# Altium PCB nfc.PcbDoc
Units mil, origin at the board's own origin, x right, y up, seen from the top; angles counter-clockwise.
Board outline 6000 x 4000 mil, 2 copper layers (Top Layer, Bottom Layer); 33 components, 60 nets, 92 pads, 0 vias.
Unrouted connection lines stored in the file: 44.
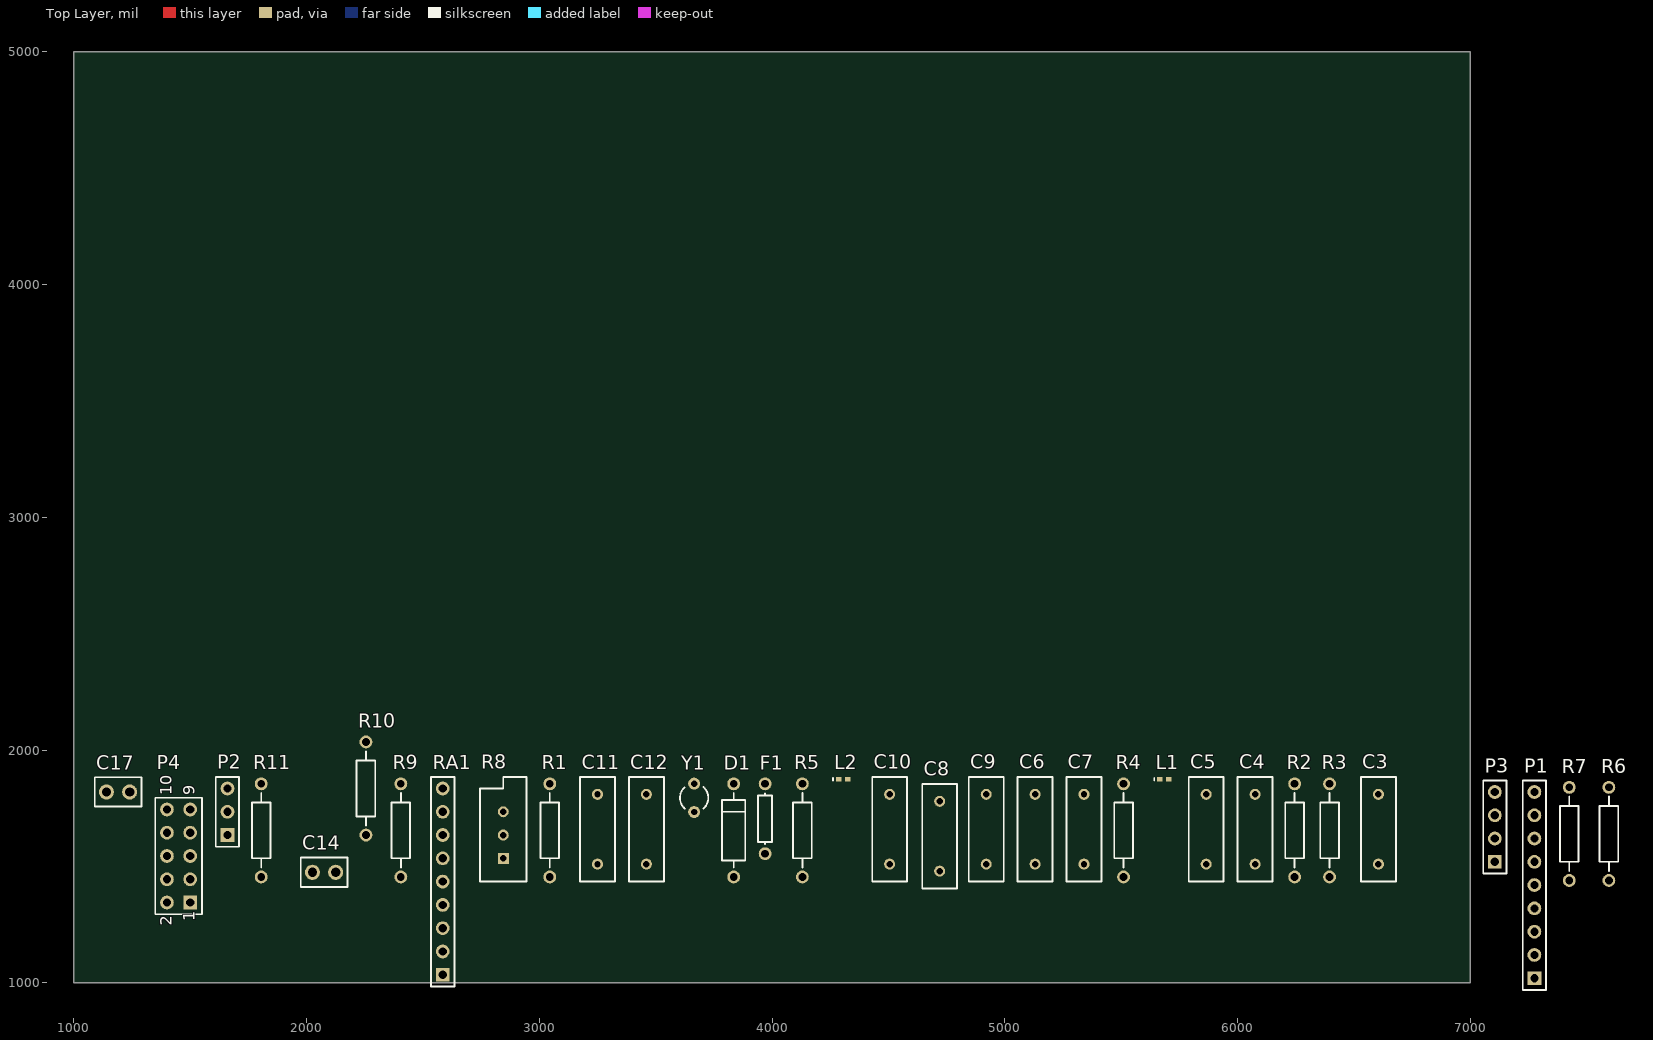
[diagram p0: Top Layer view]
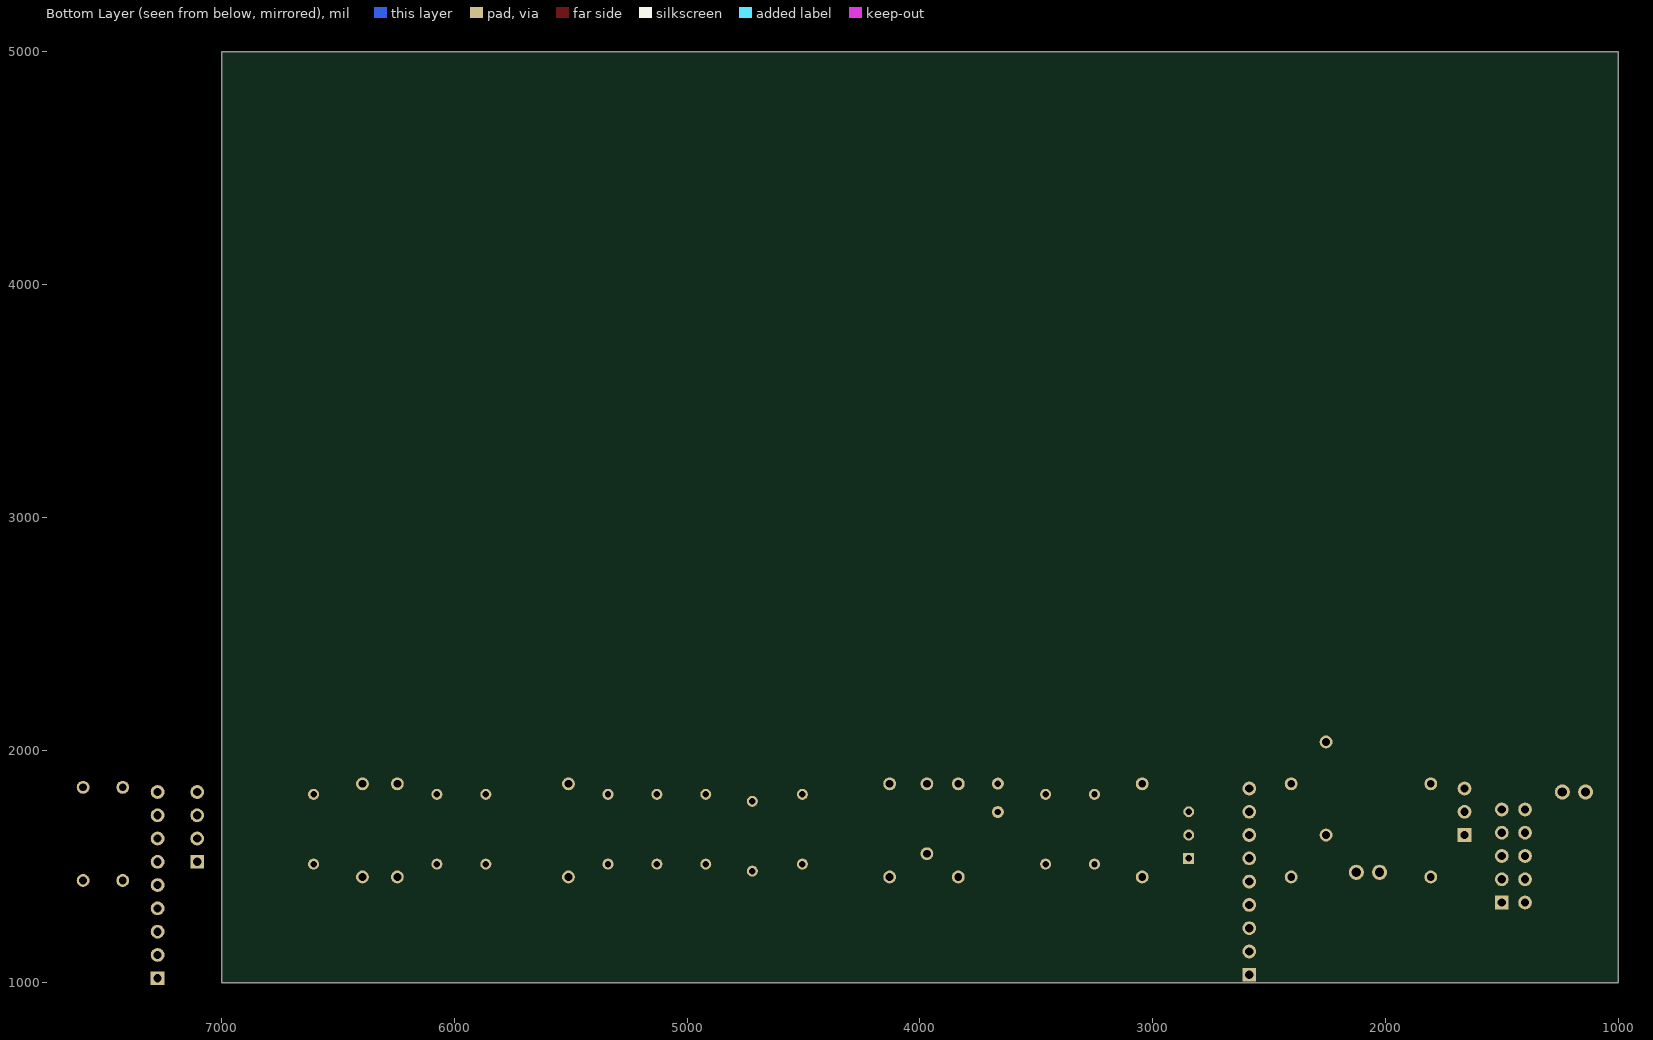
[diagram p1: Bottom Layer view, seen from below]

## Layer stack, top to bottom
Top Layer: signal copper 1.4
Dielectric: dielectric 12.6, FR-4, Dk 4.8
Bottom Layer: signal copper 1.4

## Board outline
1000,1000 7000,1000 7000,5000 1000,5000

## Design rules (kind name [scope] priority, off if disabled: settings)
Clearance [All] p1: gap=10
ComponentClearance [All] p1: gap=10 collisioncheckmode=3 verticalgap=10
PolygonConnect [All] p1: connectstyle=Relief reliefconductorwidth=10 reliefentries=4 polygonreliefangle="90 Angle"
RoomDefinition nfc [InComponentClass('nfc')] p1: confinementstyle=ConfineIn formatcopy=TRUE lockcomponents=FALSE outline 1080,975 6690,975 6690,1995 1080,1995
RoutingVias [All] p1: holewidth=28 width=50 viastyle="Through Hole" minholewidth=28 minwidth=50 maxholewidth=28 maxwidth=50
SolderMaskExpansion [All] p1: expansion=4
TestPointUsage [All] p1: valid=0 allowmultiple=FALSE
Testpoint [All] p1: side=15 testpointundercomponent=TRUE minsize=40 maxsize=100 preferedsize=60 minholesize=0 maxholesize=40 preferedholesize=32 testpointgrid=1 style=1023 order=0123456789
Width [All] p1: maxlimit=10 minlimit=10 preferedwidth=10
18 further rules are at their usual default settings.

## Components (designator, comment, footprint, x,y, rotation, side; value= is the part's Value field where it differs from the comment)
C3 "Cap" RAD-0.3 6605,1660 r90 top
C4 "Cap" RAD-0.3 6075,1660 r90 top
C5 "Cap" RAD-0.3 5865,1660 r90 top
C6 "Cap" RAD-0.3 5130,1660 r90 top
C7 "Cap" RAD-0.3 5340,1660 r90 top
C8 "Cap" RAD-0.3 4720,1630 r90 top
C9 "Cap" RAD-0.3 4920,1660 r90 top
C10 "Cap" RAD-0.3 4505,1660 r90 top
C11 "Cap" RAD-0.3 3250,1660 r90 top
C12 "Cap" RAD-0.3 3460,1660 r90 top
C14 "Cap" VP32-3.2 2075,1475 r0 top
C17 "Cap" VP32-3.2 1190,1820 r0 top
D1 "Diode 1N4001" DIODE-0.4 3835,1655 r90 top
F1 "FUSE1" AXIAL-0.3 3970,1705 r90 top
L1 "Inductor" 0402-A 5685,1875 r0 top
L2 "Inductor" 0402-A 4305,1875 r0 top
P1 "Header 9" HDR1X9 7275,1020 r90 top
P2 "Header 3" HDR1X3 1660,1635 r90 top
P3 "Header 4" HDR1X4 7105,1520 r90 top
P4 "Header 5X2" HDR2X5 1500,1345 r90 top
R1 "RES" AXIAL-0.4 3045,1655 r90 top
R2 "Res2" AXIAL-0.4 6245,1655 r90 top
R3 "Res2" AXIAL-0.4 6395,1655 r90 top
R4 "Res2" AXIAL-0.4 5510,1655 r90 top
R5 "Res2" AXIAL-0.4 4130,1655 r90 top
R6 "RES" AXIAL-0.4 7595,1640 r90 top
R7 "RES" AXIAL-0.4 7425,1640 r90 top
R8 "RPot" VR5 2845,1635 r90 top
R9 "RES" AXIAL-0.4 2405,1655 r90 top
R10 "RES" AXIAL-0.4 2255,1835 r90 top
R11 "RES" AXIAL-0.4 1805,1655 r90 top
RA1 "Res Arry" HDR1X9 2585,1035 r90 top
Y1 "27.12MHz" R38 3665,1795 r0 top

## Footprints (in the part's own frame and the unit in brackets; to place one, negate y for a bottom-side part, rotate by r counter-clockwise, add the part's x,y. Pads: shape width x height; smd on the part's side, far side on the other; paste and mask are expansions set on the pad)
0402-A [mm] "Chip Inductor; Body 1 x 0.5 mm (LxW typ)"
  rect 0.6x0.5 smd: 1(-0.5,0) 2(0.5,0)
  silkscreen extent -1.1,-0.15 -1.1,0.15
AXIAL-0.3 [mm] "Resistor; 2 Leads"
  round 1.4 hole 0.85: 1(-3.81,0) 2(3.81,0)
  silkscreen extent -2.77,-0.76 2.77,0.76
AXIAL-0.4 [mm] "Resistor; 2 Leads"
  round 1.4 hole 0.85: 1(-5.08,0) 2(5.08,0)
  silkscreen extent -4.06,-1.02 4.06,1.02
DIODE-0.4 [mm] "Tunnel Diode - Dependent Source Model; 2 Leads"
  round 1.4 hole 0.85: 1(-5.08,0) 2(5.08,0)
  silkscreen extent -4.06,-1.27 4.06,1.27
HDR1X3 [mm] "Connector; Header; 3 Position"
  rect 1.5x1.5 hole 0.9: 1(0,0)
  round 1.5 hole 0.9: 2(2.54,0) 3(5.08,0)
  silkscreen extent -1.27,-1.27 6.35,1.27
HDR1X4 [mm] "Connector; Header; 4 Position"
  rect 1.5x1.5 hole 0.9: 1(0,0)
  round 1.5 hole 0.9: 2(2.54,0) 3(5.08,0) 4(7.62,0)
  silkscreen extent -1.27,-1.27 8.89,1.27
HDR1X9 [mm] "Connector; Header; 9 Position"
  rect 1.5x1.5 hole 0.9: 1(0,0)
  round 1.5 hole 0.9: 2(2.54,0) 3(5.08,0) 4(7.62,0) 5(10.16,0) 6(12.7,0) 7(15.24,0) 8(17.78,0) 9(20.32,0)
  silkscreen extent -1.27,-1.27 21.59,1.27
HDR2X5 [mm] "Connector; Header; 5x2 Position"
  rect 1.5x1.5 hole 0.9: 1(0,0)
  round 1.5 hole 0.9: 2(0,2.54) 3(2.54,0) 4(2.54,2.54) 5(5.08,0) 6(5.08,2.54) 7(7.62,0) 8(7.62,2.54) 9(10.16,0) 10(10.16,2.54)
  silkscreen extent -1.27,-1.27 11.43,3.81
R38 [mm] "Crystal, Thru-Hole; 2 Leads; Body 3.1 x 8.2 mm (Dia.xH)"
  round 1.3 hole 0.7: 1(0,1.55) 2(0,-1.55)
  silkscreen extent -1.55,-1.19 1.55,1.17
RAD-0.3 [mm] "Capacitor; 2 Leads"
  round 1.2 hole 0.7: 1(-3.81,0) 2(3.81,0)
  silkscreen extent -5.71,-1.91 5.71,1.91
VP32-3.2 [mm] "Capacitor, Ceramic, Thru-Hole, Dipped Radial; Body 5.1 x 3.2 mm (WxT) Pin Spacing 2.54 mm (typ)"
  round 1.65 hole 1: 1(-1.27,0) 2(1.27,0)
  silkscreen extent -2.55,-1.6 2.55,1.6
VR5 [mm] "Potentiometer; 3 Leads"
  rect 1.2x1.2 hole 0.7: 1(-2.54,0)
  round 1.2 hole 0.7: 2(0,0) 3(2.54,0)
  silkscreen extent -5.08,-2.54 6.35,2.54

## Part data
C3 C4 C5 C6 C7 C8 C9 C10 C11 C12 C14 C17: "Capacitor"
D1: "1 Amp General Purpose Rectifier"
P1: "Header, 9-Pin"
P2: "Header, 3-Pin"
P3: "Header, 4-Pin"
P4: "Header, 5-Pin, Dual row"
R1 R2 R3 R4 R5 R6 R7 R9 R10 R11: "Resistor"
R8: "Potentiometer"
Y1: library part XTAL, "Crystal Oscillator"

## Nets (pads, with @x,y where several pads share a name; then routed paths per layer and width w, separated by ;. In a path a pad name is that pad's centre, name@x,y a point inside that pad or via, vN(x,y) a via of type N, cw(c..) or ccw(c..) an arc to the next point about the centre after c; other vN are vias at no path point)
BEEP: 
IRQ: P1.8
KEY1: 
KEY2: 
KEY3: 
LCD_A: C4.2 C6.1 C7.1 C8.2 C9.2 C11.1 C12.1 C14.2 C17.2 D1.1 P1.9 P4.4 P4.6 P4.8 P4.10 R1.2 R8.2 R10.2 R11.1
LCD_K: C17.1 D1.2 F1.2 P1.1 P4.2 R6.2 R7.2 R8.1 R9.1 RA1.1
LED: 
MISO: P1.4
MOSI: P1.5
NCS: P1.3
NetA1_0: R4.1
NetA1_2: R5.1
NetB1_1: R7.1
NetC3_1: C3.1 R2.2
NetC3_2: C3.2 R3.2
NetC4_1: C4.1 R2.1
NetC5_1: C5.1 C6.2 L1.2 R3.1
NetC5_2: C5.2 C7.2 R4.2
NetC8_1: C8.1 C10.1 L2.2
NetC9_1: C9.1 C10.2 R5.2
NetC11_2: C11.2 Y1.1
NetC12_2: C12.2 Y1.2
NetC13_2: P2.1 R11.2
NetC15_2: 
NetC16_2: 
NetDS1_2: R1.1
NetDS2_1: R6.1
NetF1_1: F1.1
NetHeader1_3: R8.3
NetL1_1: L1.1
NetL2_1: L2.1
NetPOWER1_1: 
NetPOWER1_2: 
NetR10_1: R10.1
NRSTPD: P1.7
NSS: P1.2
P00: RA1.2
P01: RA1.3
P02: RA1.4
P03: RA1.5
P04: RA1.6
P05: RA1.7
P06: RA1.8
P07: RA1.9
P10: 
P11: 
P12: 
P13: 
P14: 
P15: P4.1
P16: P4.9
P17: P4.7
P32: C14.1
P37: 
RST: P2.2
RST2: P2.3 P4.5 R9.2
RXD: 
SCK: P1.6
TXD: 
pads on no net: P3.1 P3.2 P3.3 P3.4 P4.3

## Text inside footprints (layer, text, board x,y; h text height)
P4: Top Overlay "2" at 1420,1245 h50 r90; Top Overlay "1" at 1520,1265 h50 r90; Top Overlay "9" at 1520,1805 h50 r90; Top Overlay "10" at 1420,1805 h50 r90